# Allegro board VGroupV_EDP2.brd
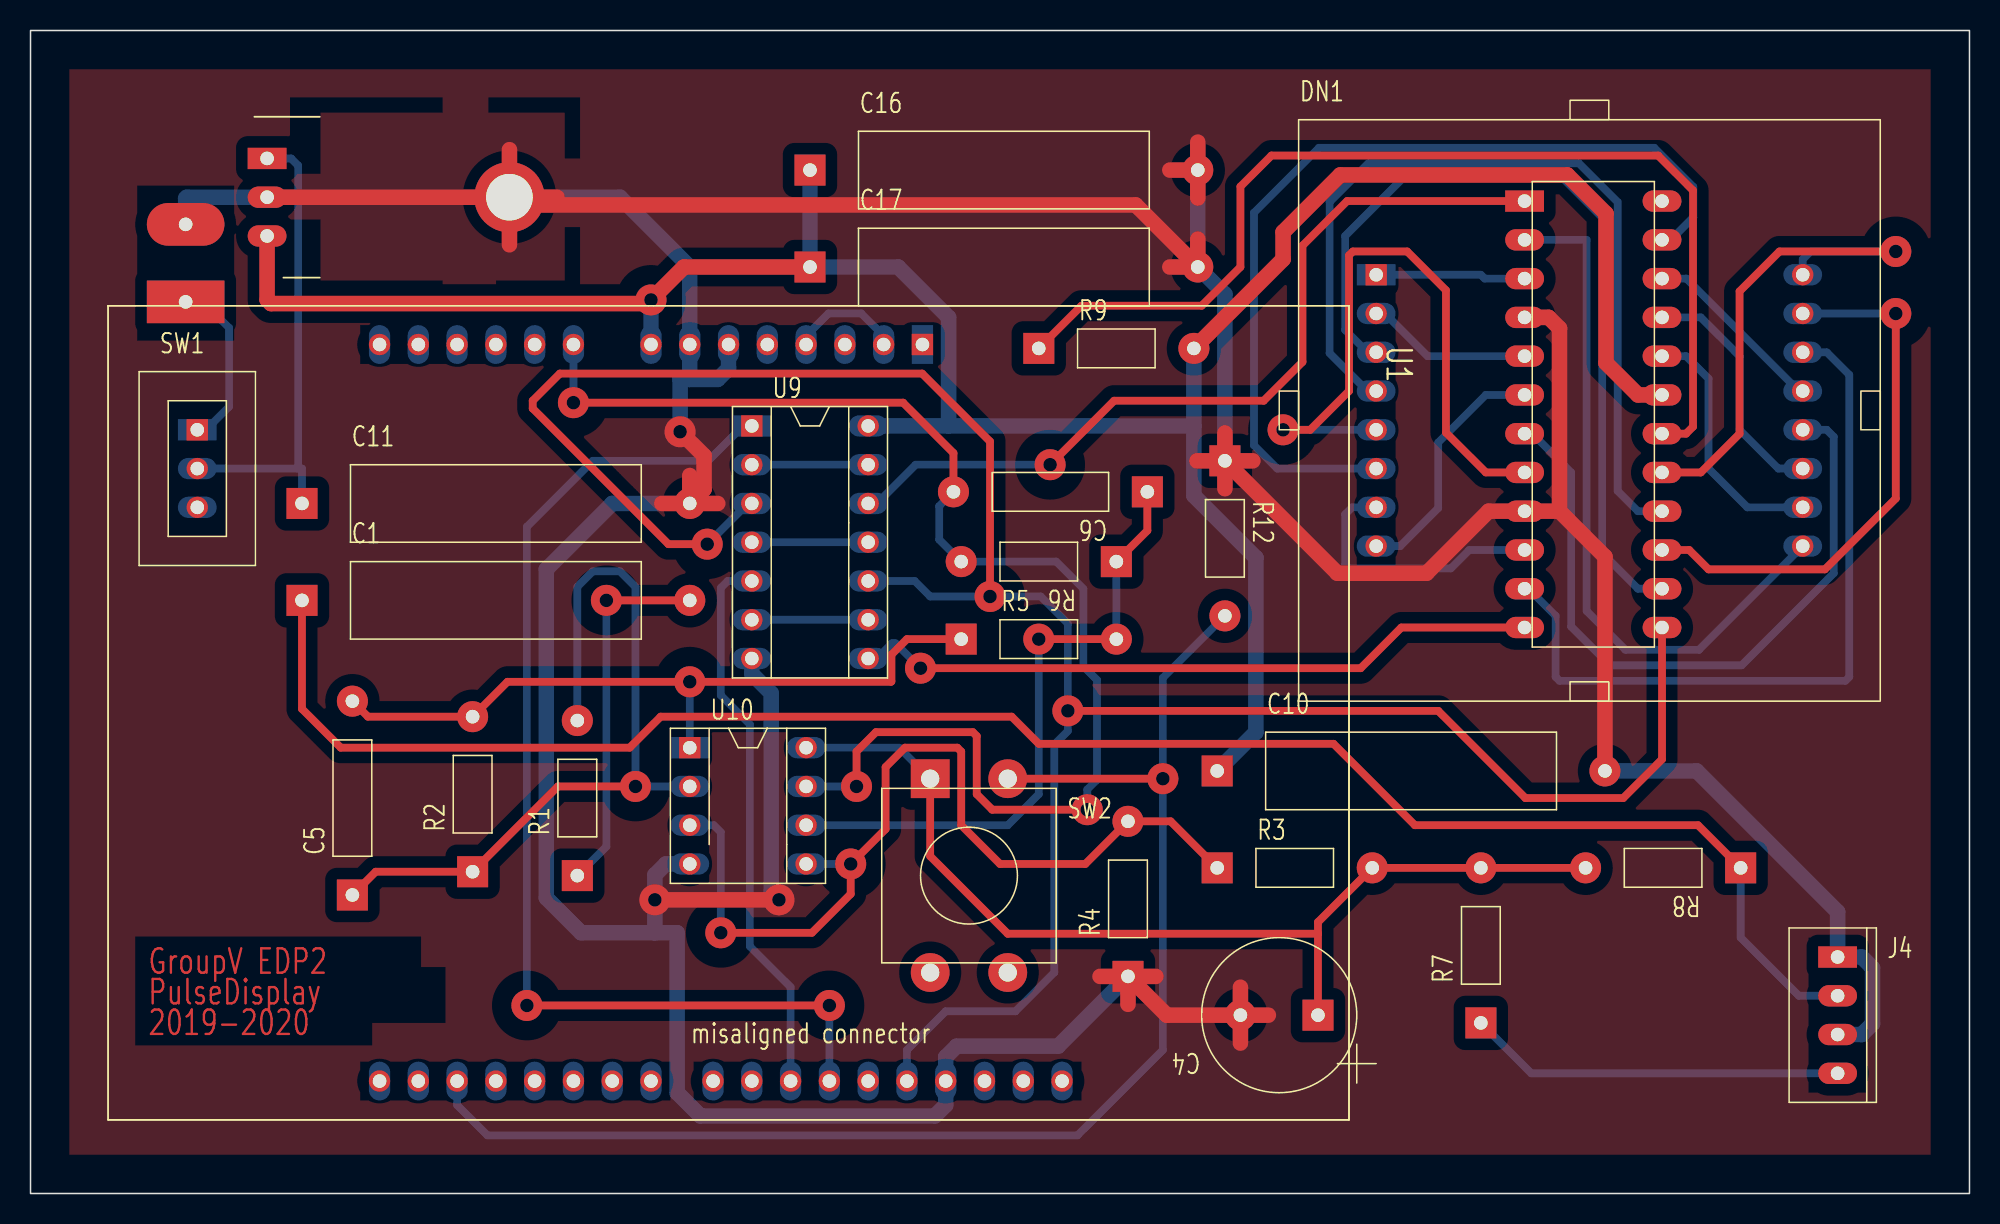
[diagram p0: board, top side]
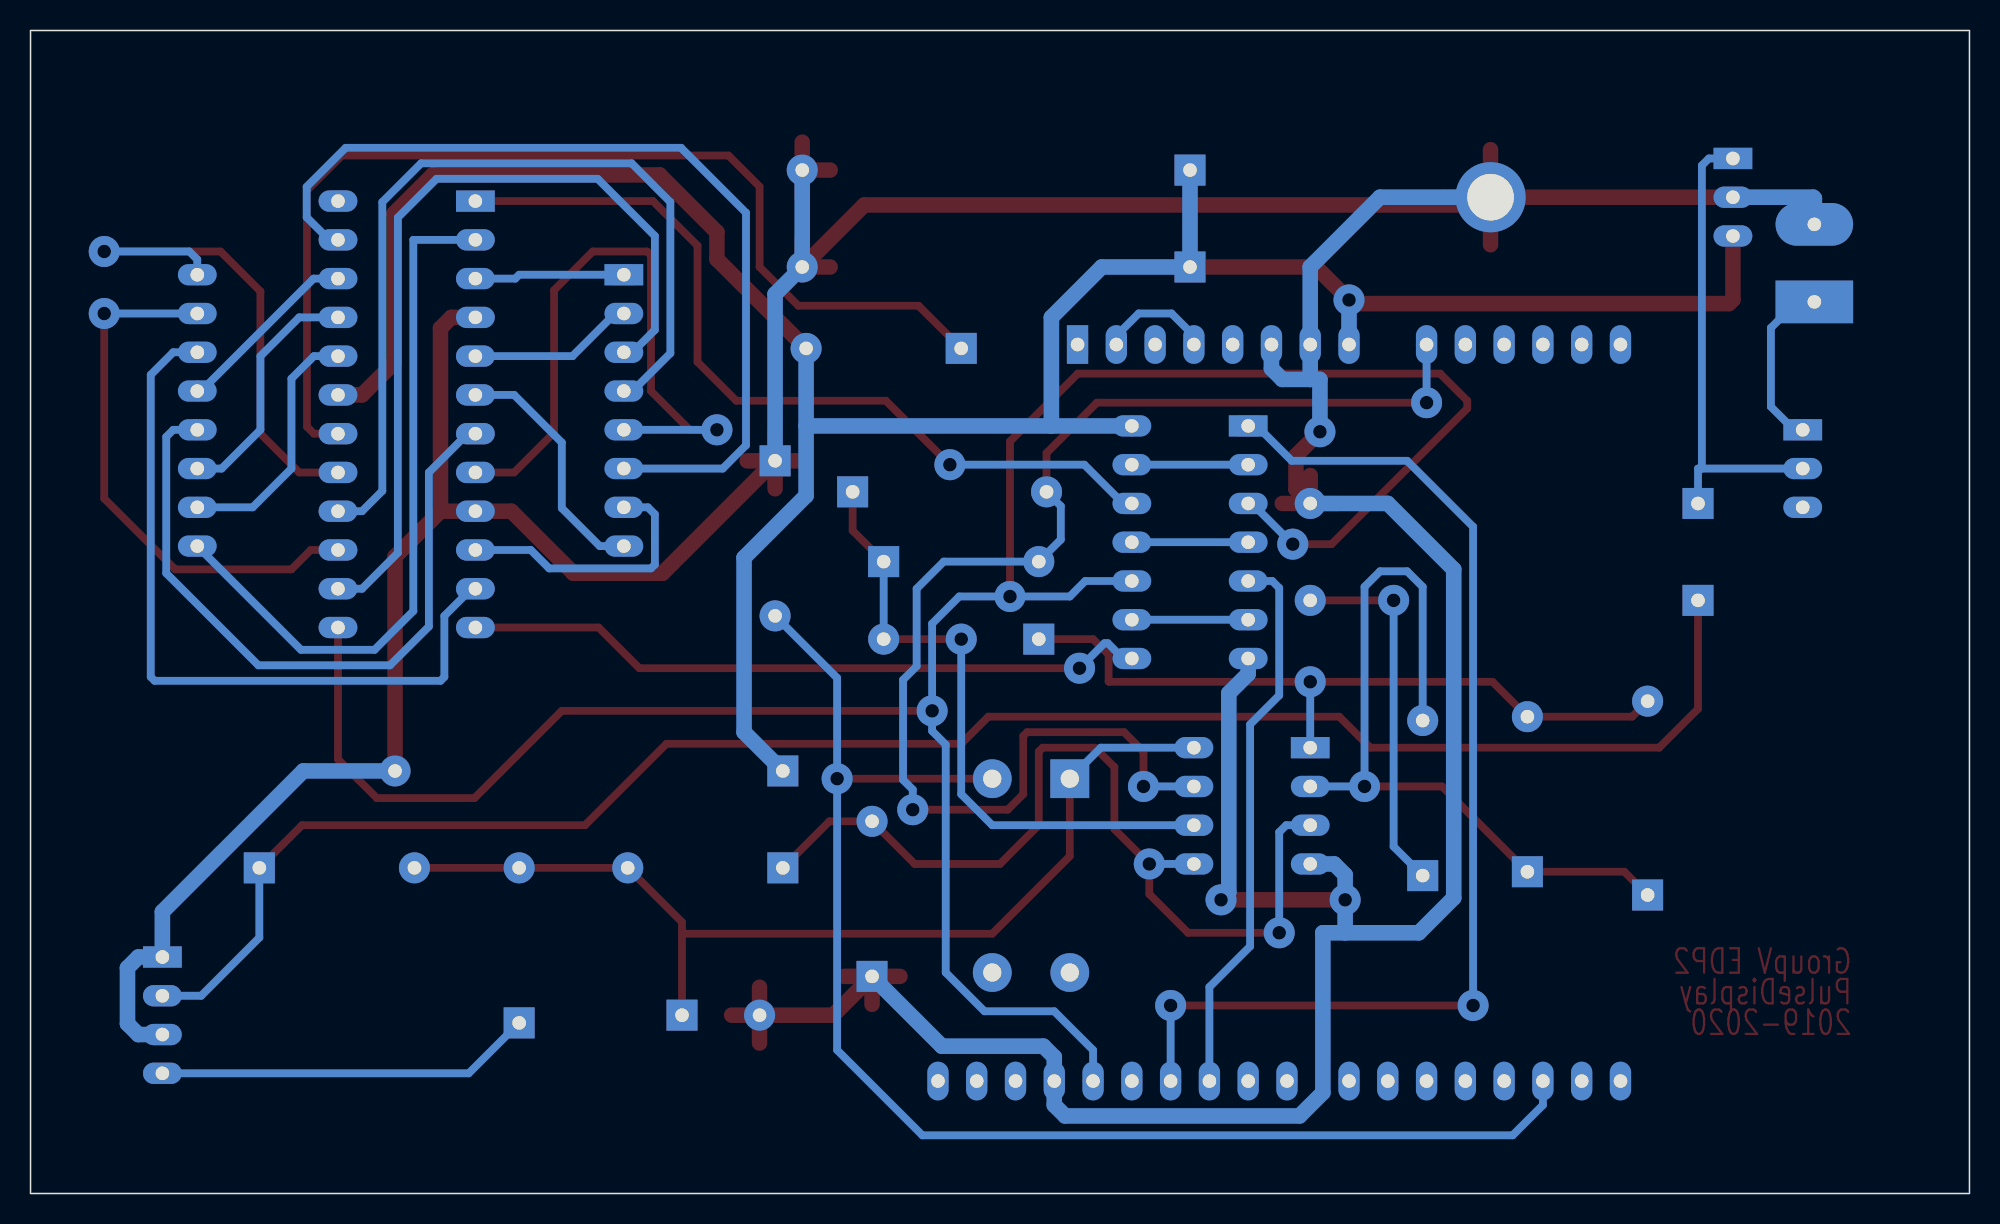
[diagram p1: board, bottom side, seen from below]

Outline 127 x 76.2 mm; copper layers: TOP, BOTTOM. Coordinates in mm from the lower left corner of the outline.
Outline path: rectangle 0,0 127,76.2

## Design rules (mm)
constraint set DEFAULT: min track width 0.508
nets with their own width: min track width 1.016; nets GND VCC

## Placement (name value [footprint] x y rotation side)
C1  1u  [GU-RC1000]  17.78 38.86 0 top
C4  220U  [GU-CAPCYL200]  84.33 11.68 180 top
C5  1n  [GU-RC500]  21.08 19.56 90 top
C6  1n  [GU-RC500]  73.15 45.97 180 top
C10  220u  [GU-RC1000]  77.72 27.69 0 top
C11  0.1u  [GU-RC1000]  17.78 45.21 0 top
C16  0.1u  [GU-RC1000]  51.05 67.06 0 top
C17  10u  [GU-RC1000]  51.05 60.71 0 top
DN1  LedArr-8x8  [GU-DIPLONG16-1100]  88.14 60.2 0 top
J1  BATTERY 9V  [GU-TERMINAL2-200]  10.16 58.42 180 top
J4  CON4  [GU-MOLEX4]  118.36 15.49 0 top
R1  10k  [GU-RC400]  35.81 20.83 90 top
R2  50k  [GU-RC400]  28.96 21.08 90 top
R3  100k  [GU-RC400]  77.72 21.34 0 top
R4  100k  [GU-RC400]  71.88 14.22 90 top
R5  1k  [GU-RC400]  60.96 36.32 0 top
R6  50k  [GU-RC400]  71.12 41.4 180 top
R7  100  [GU-RC400]  95 11.18 90 top
R8  10k  [GU-RC400]  112.01 21.34 180 top
R9  30k  [GU-RC400]  66.04 55.37 0 top
R12  3k3  [GU-RC400]  78.23 48.01 270 top
SW1  SW_SL_SPDT  [GU-SW-SLIDE-SPDT]  10.92 50.04 0 top
SW2  SW PUSHBUTTON-SPST-2/SM  [GU-PUSH52]  58.93 27.18 0 top
U1  FRDM-KL25Z-Arduino  [GU-FRDM-ARDUINO]  58.42 55.63 270 top
U5  LM2937  [GU-LM2937]  15.49 67.82 0 top
U8  MAX7221  [GU-DIP24]  102.36 51.05 0 top
U9  74HCT04  [GU-DIPSOCK14]  47.24 50.29 0 top
U10  MCP6292  [GU-DIPSOCK8]  43.18 29.21 0 top

## Library data of the parts
C1 C5 C6 = C
C4 = C_elect_0
C10 C11 C16 C17 = CAPACITOR NON-POL
DN1 = LedArr-8x8
J1 = CON2: User Part Number: TERMINAL2-200
J4 = CON4
R1-R9 R12 = R
SW1 = SW_SL_SPDT
SW2 = SW PUSHBUTTON-SPST-2/SM_1
U1 = FRDM-KL25Z-Arduino
U5 = LM2937_0
U8 = MAX7221_7
U9 = 74HCT04
U10 = MCP6292

## Footprints (pads in the part's own frame, mm; a bottom-side part is the same pattern mirrored in y, then rotated)
GU-CAPCYL200
  rect 2.032x2.032 hole 0.889: 1(0,0)
  round 2.032 hole 0.889: 2(5.08,0)
GU-DIP24
  rect 2.54x1.397 hole 0.889: 1(-4.5,13.97)
  oval 2.54x1.397 hole 0.889: 2(-4.5,11.43) 3(-4.5,8.89) 4(-4.5,6.35) 5(-4.5,3.81) 6(-4.5,1.27) 7(-4.5,-1.27) 8(-4.5,-3.81) 9(-4.5,-6.35) 10(-4.5,-8.89) 11(-4.5,-11.43) 12(-4.5,-13.97) 13(4.5,-13.97) 14(4.5,-11.43) 15(4.5,-8.89) 16(4.5,-6.35) 17(4.5,-3.81) 18(4.5,-1.27) 19(4.5,1.27) 20(4.5,3.81) 21(4.5,6.35) 22(4.5,8.89) 23(4.5,11.43) 24(4.5,13.97)
GU-DIPLONG16-1100
  rect 1.397x1.397 hole 0.889: 1(0,0)
  round 1.397 hole 0.889: 2(0,-2.54) 3(0,-5.08) 4(0,-7.62) 5(0,-10.16) 6(0,-12.7) 7(0,-15.24) 8(0,-17.78) 9(27.94,-17.78) 10(27.94,-15.24) 11(27.94,-12.7) 12(27.94,-10.16) 13(27.94,-7.62) 14(27.94,-5.08) 15(27.94,-2.54) 16(27.94,0)
GU-DIPSOCK8
  rect 1.397x1.397 hole 0.889: 1(0,0)
  round 1.397 hole 0.889: 2(0,-2.54) 3(0,-5.08) 4(0,-7.62) 5(7.62,-7.62) 6(7.62,-5.08) 7(7.62,-2.54) 8(7.62,0)
GU-DIPSOCK14
  rect 1.397x1.397 hole 0.889: 1(0,0)
  round 1.397 hole 0.889: 2(0,-2.54) 3(0,-5.08) 4(0,-7.62) 5(0,-10.16) 6(0,-12.7) 7(0,-15.24) 8(7.62,-15.24) 9(7.62,-12.7) 10(7.62,-10.16) 11(7.62,-7.62) 12(7.62,-5.08) 13(7.62,-2.54) 14(7.62,0)
GU-FRDM-ARDUINO
  rect 1.397x1.397 hole 0.889: 1(0,0)
  round 1.397 hole 0.889: 2(0,-2.54) 3(0,-5.08) 4(0,-7.62) 5(0,-10.16) 6(0,-12.7) 7(0,-15.24) 8(0,-17.78) 9(0,-22.86) 10(0,-25.4) 11(0,-27.94) 12(0,-30.48) 13(0,-33.02) 14(0,-35.56) 15(48.26,-35.56) 16(48.26,-33.02) 17(48.26,-30.48) 18(48.26,-27.94) 19(48.26,-25.4) 20(48.26,-22.86) 21(48.26,-20.32) 22(48.26,-17.78) 23(48.26,-13.716) 24(48.26,-11.176) 25(48.26,-8.636) 26(48.26,-6.096) 27(48.26,-3.556) 28(48.26,-1.016) 29(48.26,1.524) 30(48.26,4.064) 31(48.26,6.604) 32(48.26,9.144)
GU-LM2937
  rect 2.54x1.397 hole 0.889: 1(0,0)
  oval 2.54x1.397 hole 0.889: 2(0,-2.54) 3(0,-5.08)
  round 4.6 hole 3.05: 4(15.875,-2.54)
GU-MOLEX4
  rect 2.54x1.397 hole 0.889: 1(0,0)
  oval 2.54x1.397 hole 0.889: 2(0,-2.54) 3(0,-5.08) 4(0,-7.62)
GU-PUSH52
  rect 2.54x2.54 hole 1.194: 1(0,0)
  round 2.54 hole 1.194: 2(5.08,0) 3(0,-12.7) 4(5.08,-12.7)
GU-RC400
  rect 2.032x2.032 hole 0.889: 1(0,0)
  round 2.032 hole 0.889: 2(10.16,0)
GU-RC500
  rect 2.032x2.032 hole 0.889: 1(0,0)
  round 2.032 hole 0.889: 2(12.7,0)
GU-RC1000
  rect 2.032x2.032 hole 0.889: 1(0,0)
  round 2.032 hole 0.889: 2(25.4,0)
GU-SW-SLIDE-SPDT
  rect 1.397x1.397 hole 0.889: 1(0,0)
  round 1.397 hole 0.889: 2(0,-2.54) 3(0,-5.08)
GU-TERMINAL2-200
  rect 5.08x2.794 hole 0.889: 1(0,0)
  oval 5.08x2.794 hole 0.889: 2(0,-5.08)

## Nets
3V3: C4.1 R3.2 R7.2 R8.2 SW2.1(4) U1.2 U1.4 U10.8
GND: C4.2(-) C10.2 C11.2 C16.2 C17.2 J1.2 J4.1 J4.3 R4.1 R12.1 U1.6 U1.7 U1.29 U5.2 U5.4 U8.4 U8.9 U9.7 U10.4
VCC: C10.1 C16.1 C17.1 R9.2 U1.8 U5.3(OUT) U8.19(VCC) U9.14
VIN: C1.1 J4.2 R8.1
CS: U8.12 U9.8
LOAD: U1.25 U9.5
MOSI: U1.26 U9.1
SCLK: U1.28 U8.13 U9.3 U9.10
SDI: U8.1 U9.12(Y)
VOUT: C6.2 R6.2 U1.9 U10.7(OUT)
VREF: R3.1 R4.2 U10.3 U10.5
N08137: C5.1 R1.2 R2.1 U10.2
N08145: C5.2 R2.2 R5.1 U10.1
N08157: C6.1 R5.2 R6.1 U10.6
N08433: C1.2 R1.1
N10280: J4.4 R7.1
N13184: U9.4 U9.11
N13188: U9.2 U9.13
N13195: U9.6 U9.9
N25169: DN1.16 U8.17
N25451: DN1.13 U8.22
N25464: DN1.3 U8.14
N25471: DN1.4 U8.16
N25478: DN1.10 U8.20
N25485: DN1.6 U8.23
N25492: DN1.11 U8.21
N25499: DN1.15 U8.15
N28309: J1.1 SW1.1
N28319: C11.1 SW1.2 U5.1
N29244: R12.2 SW2.2 U1.17
N68469: R9.1 U8.18
N1135613: DN1.9 U8.2
N1135614: DN1.14 U8.11
N1135615: DN1.8 U8.6
N1135616: DN1.12 U8.7
N1135617: DN1.1 U8.3
N1135618: DN1.7 U8.10
N1135619: DN1.2 U8.5
N1135620: DN1.5(RA8) U8.8

Pads without a net: SW1 3; SW2 3 4; U1 1 3 5 10 11 12 13 14 15 16 18 19 20 21 22 23 24 27 30 31 32; U8 24

## Via types
v1: diameter 2.032, hole 0.889, TOP to BOTTOM, 24 vias

## Routing (per net, layer and track width the routed paths; a pad name or vN(x,y) marks a point on that pad's centre or on a via; arc(x,y) is an arc through that point)
3V3: length 74.1
  TOP w0.508: R8.2 R7.2 R3.2 84.33,17.78 84.33,17.02 ; 84.33,17.02 C4.1 ; 84.33,17.02 64.01,17.02 58.93,22.1 SW2.1
  BOTTOM w0.508: U10.8 56.9,29.21 SW2.1 ; U1.4 50.8,56.2 52.26,57.66 54.42,57.66 55.88,56.2 U1.2
GND: length 385.5
  TOP w1.016: U5.4 31.88,64.77 72.39,64.77 C17.2 ; U5.4 31.37,62.16 ; U5.4 31.37,68.39 ; U5.4 34.48,65.28 ; U5.4 U5.2 ; C16.2 76.45,68.89 ; C16.2 74.62,67.06 ; C16.2 76.45,65.23 ; R4.1 74.42,11.68 C4.2 ; R4.1 73.71,14.22 ; R4.1 70.05,14.22 ; R4.1 71.88,12.39 ; 41.35,45.21 C11.2 ; C11.2 45.01,45.21 ; C11.2 43.18,47.04 ; C11.2 44.11,46.15 44.11,48.34 v1(42.55,49.91) ; 79.25,9.85 C4.2 ; C4.2 81.08,11.68 ; C4.2 79.25,13.51 ; 78.23,46.18 R12.1 ; R12.1 78.23,49.84 ; R12.1 85.6,40.64 91.44,40.64 95.5,44.7 U8.9 100.15,44.7 ; R12.1 80.06,48.01 ; R12.1 76.4,48.01 ; C17.2 74.62,60.71 ; C17.2 76.45,62.54 ; C10.2 103.12,41.73 100.15,44.7 ; 100.15,44.7 100.15,56.69 99.44,57.4 U8.4 ; v1(49.02,19.24) v1(40.89,19.24)
  BOTTOM w1.016: U1.6 45.72,54.05 45.01,53.34 43.18,53.34 ; U10.4 41.61,21.59 40.89,20.88 v1(40.89,19.24) 40.89,17.08 ; 40.89,17.08 36.07,17.08 33.78,19.37 33.78,40.89 38.1,45.21 C11.2 ; 40.89,17.08 42.35,17.08 42.35,6.6 43.88,5.08 59.23,5.08 59.94,5.79 U1.29 59.94,8.94 60.66,9.65 67.31,9.65 R4.1 ; U5.4 38.61,65.28 43.18,60.71 U1.7 43.18,53.34 ; R12.1 78.23,58.93 C17.2 C16.2 ; J4.3 119.94,10.41 120.65,11.13 120.65,14.78 119.94,15.49 J4.1 118.36,18.45 109.13,27.69 C10.2 ; v1(42.55,49.91) 42.55,53.34 43.18,53.34 ; U5.2 10.24,65.28 10.16,65.2 J1.2 ; v1(49.02,19.24) 48.51,19.75 48.51,32.78 47.24,34.05 U9.7
VCC: length 167.5
  TOP w1.016: U5.3 15.49,58.56 15.75,58.31 40.4,58.31 v1(40.64,58.55) 42.8,60.71 C17.1 ; U8.19 105.29,52.32 103.2,54.42 103.2,64.2 100.66,66.74 85.79,66.74 82.04,62.99 82.04,61.21 R9.2
  BOTTOM w1.016: U1.8 v1(40.64,58.55) ; C10.1 80.26,30.23 80.26,41.66 76.2,45.72 76.2,50.29 ; 60.13,50.29 76.2,50.29 ; 60.13,50.29 60.13,57.4 56.83,60.71 C17.1 C16.1 ; 60.13,50.29 U9.14 ; 76.2,50.29 R9.2
VIN: length 119.8
  TOP w0.508: R8.1 109.22,24.13 90.68,24.13 85.34,29.46 66.04,29.46 64.26,31.24 41.27,31.24 39.24,29.21 20.32,29.21 17.78,31.75 C1.1
  BOTTOM w0.508: J4.2 115.82,12.95 112.01,16.76 R8.1
CS: length 45.2
  TOP w0.508: U8.12 89.79,37.08 87.12,34.42 v1(58.29,34.42)
  BOTTOM w0.508: U9.8 55.44,35.05 56.44,36.06 56.65,36.06 v1(58.29,34.42)
LOAD: length 36.4
  BOTTOM w0.508: U9.5 45.67,40.13 45.21,39.67 45.21,32.64 47.12,30.73 47.12,16.19 49.78,13.53 U1.25
MOSI: length 73.6
  TOP w0.508: v1(52.32,12.32) v1(32.51,12.32)
  BOTTOM w0.508: U9.1 46.67,50.29 44.39,48.01 36.83,48.01 32.51,43.69 v1(32.51,12.32) ; U1.26 v1(52.32,12.32)
SCLK: length 164.6
  TOP w0.508: v1(67.94,31.62) 92.2,31.62 97.92,25.91 104.32,25.91 106.86,28.45 U8.13 ; v1(44.32,42.55) 41.78,42.55 32.89,51.44 32.89,51.94 34.67,53.72 58.4,53.72 62.85,49.28 v1(62.85,39.12)
  BOTTOM w0.508: U9.3 46.99,45.21 v1(44.32,42.55) ; U9.10 57.91,40.13 58.93,39.12 v1(62.85,39.12) 66.17,39.12 67.94,37.34 v1(67.94,31.62) 67.94,30.3 67.06,29.41 67.06,14.48 64.52,11.94 59.94,11.94 57.4,9.4 U1.28
SDI: length 55.7
  TOP w0.508: U8.1 86.23,65.02 83.31,62.1 83.31,54.48 80.77,51.94 70.97,51.94 v1(66.78,47.75)
  BOTTOM w0.508: U9.12 55.44,45.21 57.98,47.75 v1(66.78,47.75)
VOUT: length 87.6
  TOP w0.508: v1(69.22,25.15) 62.99,25.15 61.98,26.16 61.98,29.97 61.72,30.23 55.37,30.23 54.1,28.96 v1(54.1,26.67) ; C6.2 60.45,48.51 57.15,51.82 v1(35.56,51.82)
  BOTTOM w0.508: C6.2 59.52,45.04 59.52,42.84 R6.2 67.18,41.4 68.96,39.62 68.96,34.54 69.85,33.66 69.85,27.1 69.22,26.47 v1(69.22,25.15) ; U10.7 v1(54.1,26.67) ; U1.9 v1(35.56,51.82)
VREF: length 61.2
  TOP w0.508: v1(45.21,17.08) 51.18,17.08 53.72,19.62 v1(53.72,21.59) 56.01,23.88 56.01,27.94 57.28,29.21 60.71,29.21 60.96,28.96 60.96,24.13 63.5,21.59 69.09,21.59 R4.2 74.68,24.38 R3.1
  BOTTOM w0.508: U10.3 44.75,24.13 45.21,23.67 v1(45.21,17.08) ; U10.5 v1(53.72,21.59)
N08137: length 51.5
  TOP w0.508: v1(39.62,26.67) 34.54,26.67 R2.1 22.61,21.08 C5.1
  BOTTOM w0.508: R1.2 35.81,39.75 36.83,40.77 38.61,40.77 39.62,39.75 v1(39.62,26.67) U10.2
N08145: length 47.7
  TOP w0.508: C5.2 22.1,31.24 R2.2 31.24,33.53 v1(43.18,33.53) 56.36,33.53 56.39,33.55 56.39,35.31 57.4,36.32 R5.1
  BOTTOM w0.508: U10.1 v1(43.18,33.53)
N08157: length 41.8
  TOP w0.508: C6.1 73.15,43.43 R6.1 ; v1(66.04,36.32) R5.2
  BOTTOM w0.508: U10.6 64.01,24.13 66.04,26.16 v1(66.04,36.32) ; R6.1 R5.2
N08433: length 24.3
  TOP w0.508: C1.2 v1(37.72,38.86)
  BOTTOM w0.508: R1.1 37.72,22.73 v1(37.72,38.86)
N10280: length 24.7
  BOTTOM w0.508: R7.1 98.3,7.87 J4.4
N13184: length 7.6
  BOTTOM w0.508: U9.4 U9.11
N13188: length 7.6
  BOTTOM w0.508: U9.13 U9.2
N13195: length 7.6
  BOTTOM w0.508: U9.6 U9.9
N25169: length 34.1
  TOP w0.508: v1(122.17,61.72) 114.55,61.72 111.94,59.11 111.94,49.78 109.4,47.24 U8.17
  BOTTOM w0.508: DN1.16 116.08,61.2 116.6,61.72 v1(122.17,61.72)
N25451: length 12.3
  BOTTOM w0.508: U8.22 108.46,59.94 115.82,52.58 DN1.13
N25464: length 55.1
  BOTTOM w0.508: U8.14 105.29,39.62 102.94,41.97 102.94,63.94 100.4,66.48 89.85,66.48 86.11,62.74 86.11,56.58 87.57,55.12 DN1.3
N25471: length 57.3
  BOTTOM w0.508: U8.16 105.29,44.7 103.96,46.03 103.96,64.96 101.42,67.5 87.63,67.5 85.09,64.96 85.09,55.05 87.57,52.58 DN1.4
N25478: length 16.8
  BOTTOM w0.508: DN1.10 112.45,44.96 109.91,47.5 109.91,53.39 108.44,54.86 U8.20
N25485: length 60.1
  BOTTOM w0.508: U8.23 107.43,62.48 108.91,63.96 108.91,65.96 106.35,68.52 84.39,68.52 80.14,64.26 80.14,49.02 81.66,47.5 DN1.6
N25492: length 16.1
  BOTTOM w0.508: DN1.11 114.48,47.5 111.94,50.04 111.94,54.86 109.4,57.4 U8.21
N25499: length 36
  TOP w0.508: v1(122.17,57.66) 122.17,45.54 117.53,40.89 109.91,40.89 108.64,42.16 U8.15
  BOTTOM w0.508: DN1.15 v1(122.17,57.66)
N28309: length 11.4
  BOTTOM w0.508: SW1.1 11.49,50.04 13.01,51.55 13.01,56.72 11.3,58.42 J1.1
N28319: length 31.2
  BOTTOM w0.508: 17.53,47.5 17.53,67.36 17.07,67.82 U5.1 ; 17.53,47.5 SW1.2 ; 17.53,47.5 17.78,47.5 C11.1
N29244: length 91.2
  TOP w0.508: SW2.2 v1(74.17,27.18)
  BOTTOM w0.508: U1.17 27.94,5.79 29.92,3.81 68.58,3.81 74.17,9.4 v1(74.17,27.18) 74.17,33.78 R12.2
N68469: length 69.8
  TOP w0.508: U8.18 108.44,49.78 108.89,50.24 108.89,65.72 106.61,68.01 81.28,68.01 79.25,65.98 79.25,60.71 76.71,58.17 68.83,58.17 R9.1
N1135613: length 46.4
  BOTTOM w0.508: DN1.9 109.28,35.62 104.47,35.62 101.93,38.16 101.93,62.48 U8.2
N1135614: length 49.7
  BOTTOM w0.508: DN1.14 117.65,55.12 119.13,53.64 119.13,33.85 118.87,33.59 100.15,33.59 99.89,33.85 99.89,37.85 98.12,39.62 U8.11
N1135615: length 16.3
  BOTTOM w0.508: U8.6 95.32,52.32 92.2,49.2 92.2,44.91 89.71,42.42 DN1.8
N1135616: length 46.1
  BOTTOM w0.508: DN1.12 117.65,50.04 118.11,49.58 118.11,40.64 112.08,34.61 103.45,34.61 100.91,37.15 100.91,47.24 98.37,49.78 U8.7
N1135617: length 9.8
  BOTTOM w0.508: U8.3 95.25,59.94 95,60.2 DN1.1
N1135618: length 17.9
  BOTTOM w0.508: U8.10 94.23,42.16 93.03,40.96 86.36,40.96 86.11,41.21 86.11,44.5 86.56,44.96 DN1.7
N1135619: length 10.9
  BOTTOM w0.508: DN1.2 88.71,57.66 91.5,54.86 U8.5
N1135620: length 43.4
  TOP w0.508: v1(82.04,50.04) 83.82,50.04 86.36,52.58 86.36,61.47 86.61,61.72 90.17,61.72 92.71,59.18 92.71,49.86 95.32,47.24 U8.8
  BOTTOM w0.508: DN1.5 v1(82.04,50.04)

## Copper pours and planes (outline as drawn; the poured copper is in the pictures)
GND on TOP: 2.54,73.66 124.46,73.66 124.46,2.54 2.54,2.54 ; 25 cut-outs

## Text on the board
TOP: GroupV EDP2 | PulseDisplay | 2019-2020
